# Altium PCB keyboard.pcbdoc
Units mm, origin at the board's own origin, x right, y up, seen from the top; angles counter-clockwise.
Board outline 101.85 x 125.6 mm, 2 copper layers (Top Layer, Bottom Layer); 27 components, 54 nets, 111 pads, 8 vias.
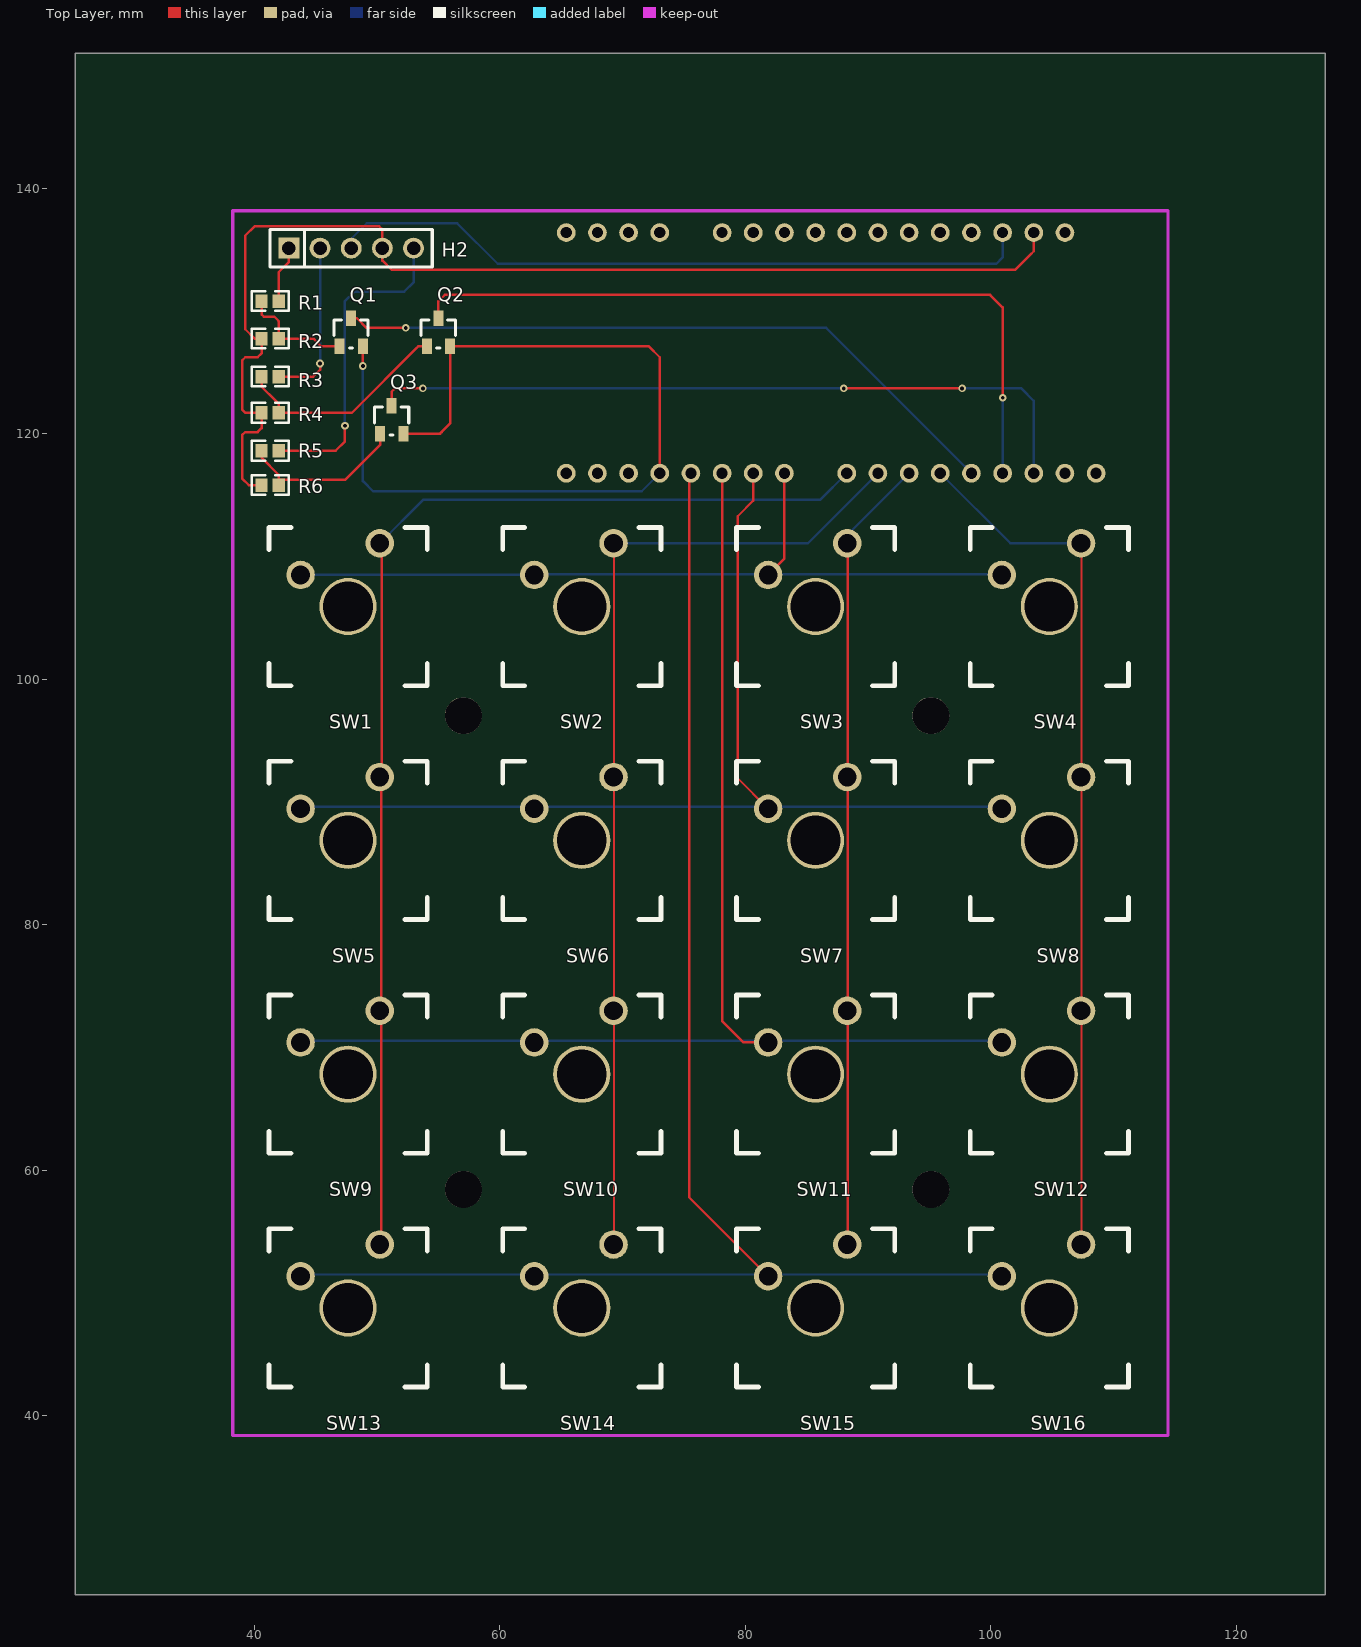
[diagram p0: Top Layer view]
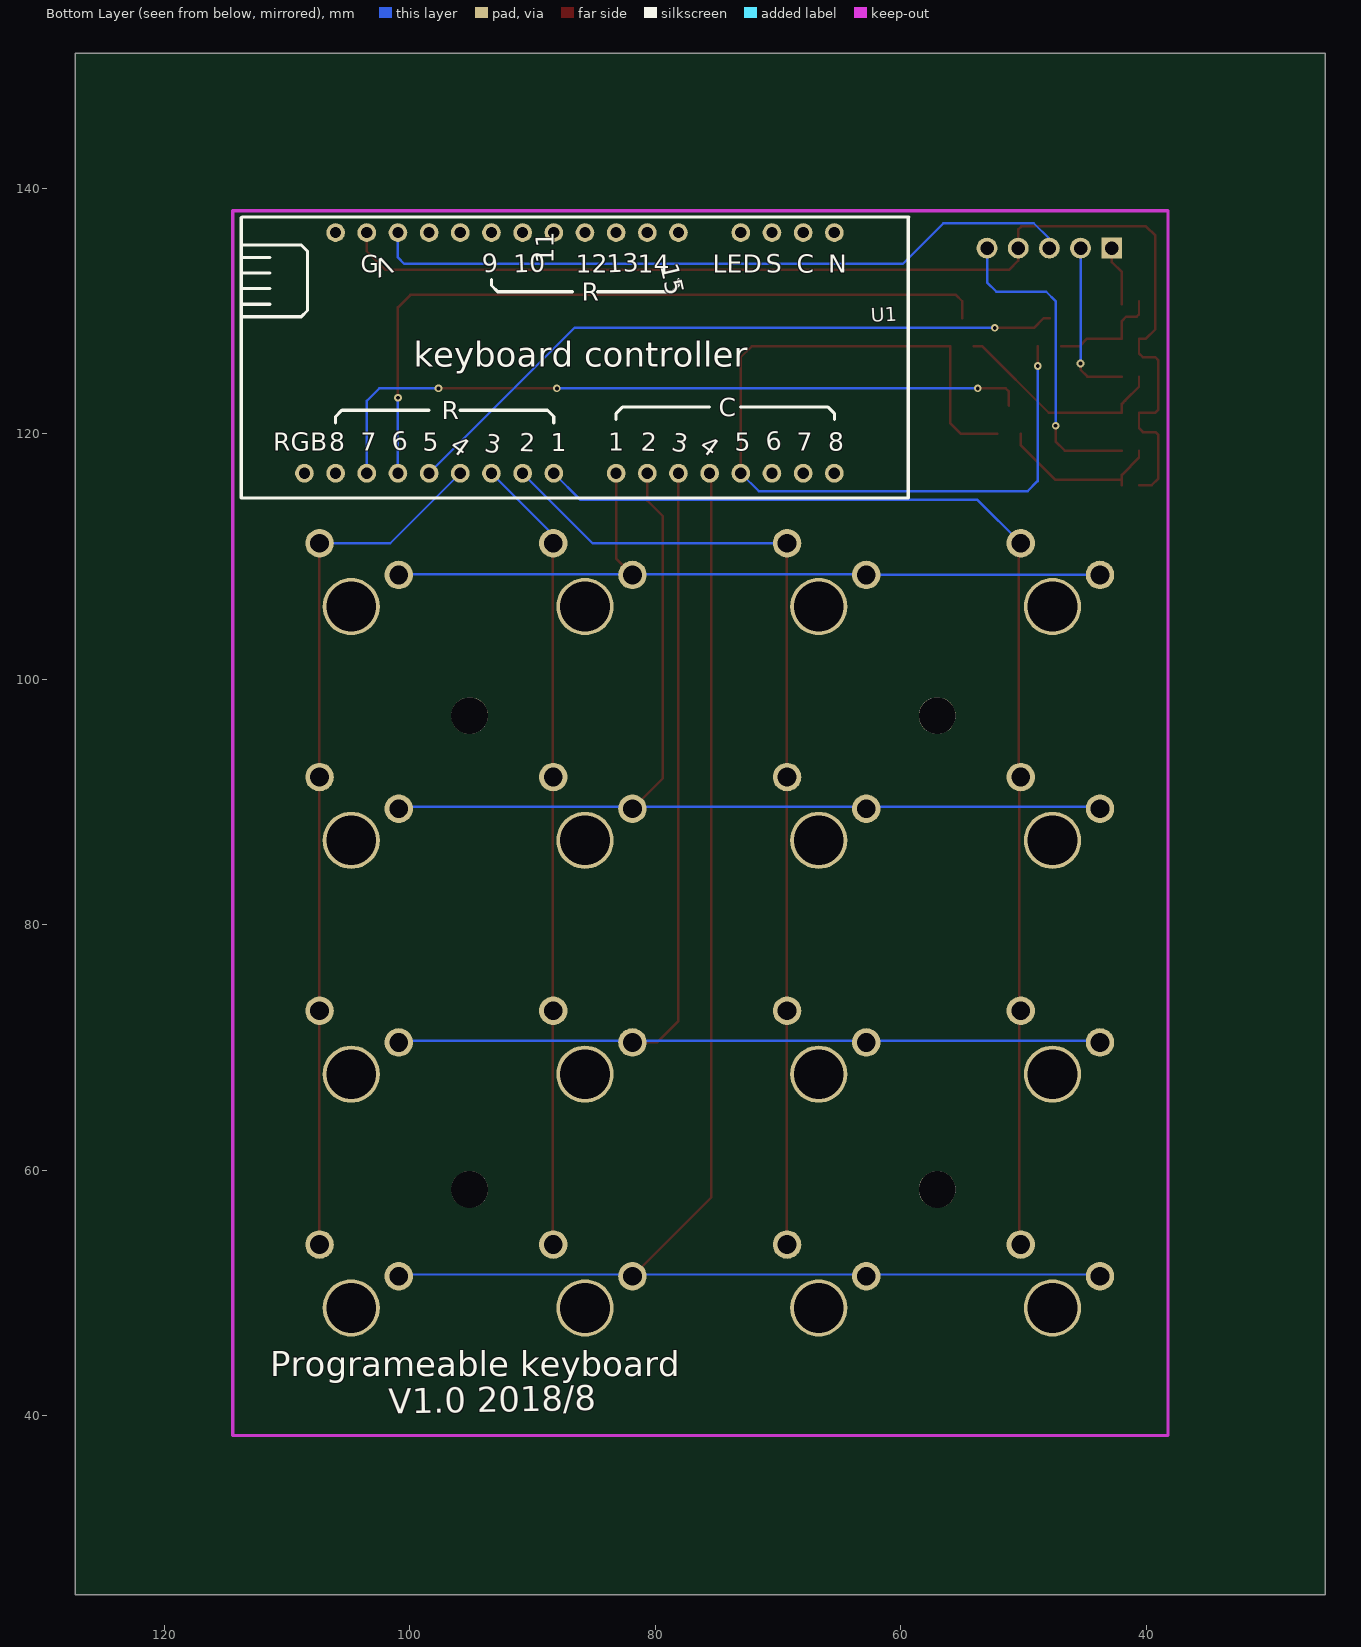
[diagram p1: Bottom Layer view, seen from below]

## Layer stack, top to bottom
Top Layer: signal copper (thickness not stored)
Dielectric: dielectric 0.32, FR-4, Dk 4.8
Bottom Layer: signal copper (thickness not stored)

## Board outline
127.254,25.4 25.4,25.4 25.4,151.003 127.254,151.003

## Components (designator, comment, footprint, x,y, rotation, side; value= is the part's Value field where it differs from the comment)
H2 "Header-Male-2.54_1x5" DIP-1X5P-2.54MM-M 47.879,135.128 r0 top
Q1 "9013M-H" SOT-23 47.879,128.27 r0 top
Q2 "9013M-H" SOT-23 54.991,128.27 r0 top
Q3 "9013M-H" SOT-23 51.181,121.158 r0 top
R1 "1KΩ" 0603 41.275,130.81 r0 top
R2 "1KΩ" 0603 41.275,127.762 r0 top
R3 "1KΩ" 0603 41.275,124.663 r0 top
R4 "1KΩ" 0603 41.275,121.716 r0 top
R5 "1KΩ" 0603 41.275,118.618 r0 top
R6 "1KΩ" 0603 41.275,115.824 r0 top
SW1 "EVQ22705R" 三脚轴无灯 47.625,105.918 r0 top
SW2 "EVQ22705R" 三脚轴无灯 66.675,105.918 r0 top
SW3 "EVQ22705R" 三脚轴无灯 85.725,105.918 r0 top
SW4 "EVQ22705R" 三脚轴无灯 104.775,105.918 r0 top
SW5 "EVQ22705R" 三脚轴无灯 47.625,86.868 r0 top
SW6 "EVQ22705R" 三脚轴无灯 66.675,86.868 r0 top
SW7 "EVQ22705R" 三脚轴无灯 85.725,86.868 r0 top
SW8 "EVQ22705R" 三脚轴无灯 104.775,86.868 r0 top
SW9 "EVQ22705R" 三脚轴无灯 47.625,67.818 r0 top
SW10 "EVQ22705R" 三脚轴无灯 66.675,67.818 r0 top
SW11 "EVQ22705R" 三脚轴无灯 85.725,67.818 r0 top
SW12 "EVQ22705R" 三脚轴无灯 104.775,67.818 r0 top
SW13 "EVQ22705R" 三脚轴无灯 47.625,48.768 r0 top
SW14 "EVQ22705R" 三脚轴无灯 66.675,48.768 r0 top
SW15 "EVQ22705R" 三脚轴无灯 85.725,48.768 r0 top
SW16 "EVQ22705R" 三脚轴无灯 104.775,48.768 r0 top
U1 "keyboard controller" "KEYBOARD CONTROLLER" 113.665,138.938 r0 bottom

## Footprints (in the part's own frame and the unit in brackets; to place one, negate y for a bottom-side part, rotate by r counter-clockwise, add the part's x,y. Pads: shape width x height; smd on the part's side, far side on the other; paste and mask are expansions set on the pad)
0603 [mm]
  rect 1x1.1 smd: 1(-0.7,0) 2(0.7,0)
  silkscreen extent -1.5,-0.8 1.5,0.8
DIP-1X5P-2.54MM-M [mm]
  rect 1.7x1.7 hole 1.1: 1(-5.08,0)
  round 1.7 hole 1.1: 2(-2.54,0) 3(0,0) 4(2.54,0) 5(5.08,0)
  silkscreen extent -6.6,-1.52 6.6,1.52
"KEYBOARD CONTROLLER" [mil]
  round 60 hole 36: 1(-200,872.05) 2(-300,872.05) 3(-400,872.05) 4(-500,872.05) 5(-600,872.05) 6(-700,872.05) 7(-800,872.05) 8(-900,872.05) 9(-1000,872.05) 10(-1200,872.05) 11(-1300,872.05) 12(-1400,872.05) 13(-1500,872.05) 14(-1600,872.05) 15(-1700,872.05) 16(-1800,872.05) 17(-1900,872.05) 18(-300,100) 19(-400,100) 20(-500,100) 21(-600,100) 22(-700,100) 23(-800,100) 24(-900,100) 25(-1000,100) 26(-1100,100) 27(-1200,100) 28(-1300,100) 29(-1400,100) 30(-1600,100) 31(-1700,100) 32(-1800,100) 33(-1900,100)
  silkscreen extent -2140,50 3,952
SOT-23 [mil]
  rect 31.89x50 smd: 1(-37.5,-45) 2(37.5,-45) 3(-0.5,45)
  silkscreen extent -56,-50 54,40
三脚轴无灯 [mil]
  round 91.4 hole 60: 1(101.6,203.2) 2(-152.4,101.6)
  round 183.5 hole 159.6: ""(0,0)
  silkscreen extent -254,-254 254,254

## Free pads (board coordinates)
  round 3 hole 3 unplated: ""(57.023,58.42) ""(57.023,97.028) ""(95.123,58.42) ""(95.123,97.028)

## Via types
v1: diameter 0.62, hole 0.305, Top Layer to Bottom Layer, 8 vias

## Nets (pads, with @x,y where several pads share a name; then routed paths per layer and width w, separated by ;. In a path a pad name is that pad's centre, name@x,y a point inside that pad or via, vN(x,y) a via of type N, cw(c..) or ccw(c..) an arc to the next point about the centre after c; other vN are vias at no path point)
$BoardOutlineNet: 
H2_1: H2.1 R1.2 | length 4.9
  Top Layer w0.2: R1.2@41.976,130.556 41.976,133.172 42.799,133.995 H2.1
H2_2: H2.2 R3.2 | length 14.3
  Top Layer w0.2: R3.2 44.78,124.663 45.339,125.222 v1(45.339,125.73) ; R3.2 42.758,124.663
  Bottom Layer w0.2: v1(45.339,125.73) H2.2
H2_5: H2.5 R5.2 | length 26.2
  Top Layer w0.2: R5.2 46.609,118.618 47.371,119.38 v1(47.371,120.65)
  Bottom Layer w0.2: v1(47.371,120.65) 47.371,130.81 48.133,131.572 52.197,131.572 52.959,132.334 H2.5
Q1_1: Q1.1 R1.1 R2.2 | length 9.3
  Top Layer w0.2: R1.1 40.575,129.731 40.767,129.54 41.621,129.54 41.933,129.228 41.975,129.186 R2.2 44.799,127.762 45.433,127.128 45.434,127.127 Q1.1
Q2_1: Q2.1 R3.1 R4.2 | length 17.8
  Top Layer w0.2: R3.1 40.574,123.83 41.702,122.702 41.976,122.43 41.976,121.925 R4.2 ; R4.2 47.93,121.716 53.213,127 53.34,127.127 Q2.1
Q3_1: Q3.1 R5.1 R6.2 | length 13.7
  Top Layer w0.2: R5.1 40.575,118.057 41.976,116.657 R6.2@41.976,116.24 ; R6.2 R6.2@41.976,116.24 ; Q3.1 50.228,119.098 47.371,116.24 R6.2@41.976,116.24
S$15: 
S$17: 
S$67: 
S$69: 
S$262: 
S$284: 
S$286: 
S$288: 
S$290: 
S$292: 
S$361: 
S$364: 
S$370: 
S$372: 
S$409: 
SW1_1: SW1.1 SW5.1 SW9.1 SW13.1 U1.9 | length 97.9
  Top Layer w0.2: SW13.1 50.32,54.043 SW9.1@50.32,72.979 ; SW9.1 SW9.1@50.32,72.979 ; SW1.1 50.373,110.911 50.373,92.196 SW5.1 50.32,91.915 SW9.1@50.32,72.979
  Bottom Layer w0.2: SW1.1 53.736,114.607 86.086,114.607 U1.9
SW1_2: SW1.2 SW2.2 SW3.2 SW4.2 U1.10 | length 66.1
  Top Layer w0.2: SW3.2 83.185,109.829 U1.10
  Bottom Layer w0.2: SW1.2 43.787,108.531 62.771,108.531 SW2.2 62.842,108.536 SW3.2@81.854,108.536 ; SW3.2 SW3.2@81.854,108.536 ; SW4.2 100.866,108.536 SW3.2@81.854,108.536
SW2_1: SW2.1 SW6.1 SW10.1 SW14.1 U1.8 | length 81.2
  Top Layer w0.2: SW14.1 69.296,53.969 SW10.1@69.296,72.979 ; SW10.1 SW10.1@69.296,72.979 ; SW6.1 SW6.1@69.296,92.029 ; SW2.1 69.296,111.038 SW6.1@69.296,92.029 ; SW10.1@69.296,72.979 SW6.1@69.296,92.029
  Bottom Layer w0.2: SW2.1 85.098,111.079 U1.8
SW3_1: SW3.1 SW7.1 SW11.1 SW15.1 U1.7 | length 65.1
  Top Layer w0.2: SW15.1 88.344,53.967 SW11.1@88.344,72.979 ; SW11.1 SW11.1@88.344,72.979 ; SW7.1 SW7.1@88.344,92.029 ; SW3.1 88.344,111.041 SW7.1@88.344,92.029 ; SW11.1@88.344,72.979 SW7.1@88.344,92.029
  Bottom Layer w0.2: SW3.1 88.306,111.747 U1.7
SW4_1: SW4.1 SW8.1 SW12.1 SW16.1 U1.6 | length 71.1
  Top Layer w0.2: SW16.1 107.394,53.967 SW12.1@107.394,72.979 ; SW12.1 SW12.1@107.394,72.979 ; SW8.1 SW8.1@107.394,92.029 ; SW4.1 107.394,111.041 SW8.1@107.394,92.029 ; SW12.1@107.394,72.979 SW8.1@107.394,92.029
  Bottom Layer w0.2: U1.6 101.595,111.079 SW4.1
SW5_2: SW5.2 SW6.2 SW7.2 SW8.2 U1.11 | length 86.4
  Top Layer w0.2: U1.11 80.645,114.554 79.375,113.284 79.375,91.927 SW7.2
  Bottom Layer w0.2: SW5.2 43.896,89.59 62.662,89.59 SW6.2 62.946,89.59 81.712,89.59 SW7.2 81.996,89.59 100.762,89.59 SW8.2
SW12_2: SW9.2 SW10.2 SW11.2 SW12.2 U1.12 | length 106.6
  Top Layer w0.2: U1.12 78.105,72.136 79.842,70.398 SW11.2
  Bottom Layer w0.2: SW9.2 43.896,70.54 62.662,70.54 SW10.2 62.946,70.54 81.712,70.54 SW11.2 81.996,70.54 100.762,70.54 SW12.2
SW13_2: SW13.2 SW14.2 SW15.2 SW16.2 U1.13 | length 125.7
  Top Layer w0.2: U1.13 75.42,116.641 75.42,57.782 SW15.2
  Bottom Layer w0.2: SW13.2 43.896,51.49 62.662,51.49 SW14.2 62.946,51.49 81.712,51.49 SW15.2 81.996,51.49 100.762,51.49 SW16.2
U1_1: U1.1
U1_2: U1.2
U1_3: Q3.3 U1.3 | length 59.9
  Top Layer w0.2: Q3.3 51.181,122.313 51.181,123.444 51.435,123.698 v1(53.721,123.698) ; v1(88.011,123.698) v1(97.663,123.698)
  Bottom Layer w0.2: v1(53.721,123.698) v1(88.011,123.698) ; v1(97.663,123.698) 102.489,123.698 103.505,122.682 U1.3
U1_4: Q2.3 U1.4 | length 61.5
  Top Layer w0.2: Q2.3 54.978,130.797 55.499,131.318 99.949,131.318 100.965,130.302 v1(100.965,122.936)
  Bottom Layer w0.2: U1.4 v1(100.965,122.936)
U1_5: Q1.3 U1.5 | length 55.8
  Top Layer w0.2: Q1.3 48.348,129.413 49.133,128.628 v1(52.333,128.627)
  Bottom Layer w0.2: v1(52.333,128.627) 86.573,128.638 U1.5
U1_14: Q1.2 Q2.2 Q3.2 U1.14 | length 74
  Top Layer w0.2: Q1.2 v1@48.834,125.427 ; Q3.2 55.118,120.015 55.245,120.142 55.944,120.84 Q2.2 ; Q2.2@55.944,126.667 Q2.2 ; U1.14 73.025,126.238 72.136,127.127 Q2.2
  Bottom Layer w0.2: v1(48.834,125.528) 48.834,116.139 49.657,115.316 71.553,115.316 U1.14
U1_15: U1.15
U1_16: U1.16
U1_17: U1.17
U1_18: U1.18
U1_19: H2.4 R2.1 R4.1 R6.1 U1.19 | length 96.1
  Top Layer w0.2: R6.1 39.537,115.824 39.533,115.828 38.989,116.372 38.989,116.84 38.989,119.888 39.243,120.142 40.259,120.142 40.575,120.458 R4.1 39.244,121.716 39.233,121.728 38.989,121.972 38.989,125.984 39.243,126.238 40.259,126.238 40.575,126.554 R2.1 40.005,127.762 39.243,128.524 39.243,136.144 40.005,136.906 50.165,136.906 50.419,136.652 H2.4 50.419,134.112 51.181,133.35 101.981,133.35 103.251,134.62 103.505,134.874 U1.19
U1_20: H2.3 U1.20 | length 58
  Bottom Layer w0.2: H2.3 47.879,135.89 49.149,137.16 56.515,137.16 59.817,133.858 100.457,133.858 100.965,134.366 U1.20
U1_21: U1.21
U1_22: U1.22
U1_23: U1.23
U1_24: U1.24
U1_25: U1.25
U1_26: U1.26
U1_27: U1.27
U1_28: U1.28
U1_29: U1.29
U1_30: U1.30
U1_31: U1.31
U1_32: U1.32
pads on no net: SW1. SW2. SW3. SW4. SW5. SW6. SW7. SW8. SW9. SW10. SW11. SW12. SW13. SW14. SW15. SW16. U1.33

## Silkscreen, mask and mechanical layers (free items; w line width, h text height)
Bottom Overlay:
  text "Programeable keyboard" at 111.379,43.18 h2.03
  text "V1.0 2018/8" at 101.709,40.132 h2.03 r359
Document:
  lines w0.003: 76.302,88.176 76.352,88.227

## Text inside footprints (layer, text, board x,y; h text height)
U1: Bottom Overlay "G" at 104.013,133.158 h1.4; Bottom Overlay "V" at 101.742,134.558 h1.5 r159; Bottom Overlay "9" at 94.029,133.112 h1.5 r354; Bottom Overlay "10" at 91.541,133.108 h1.5 r358; Bottom Overlay "11" at 88.277,133.858 h1.5 r270; Bottom Overlay "12" at 86.487,133.108 h1.5; Bottom Overlay "13" at 83.908,133.109 h1.5 r357; Bottom Overlay "14" at 81.407,133.108 h1.5; Bottom Overlay "15" at 79.598,133.689 h1.5 r77; Bottom Overlay "LED" at 75.311,133.108 h1.5; Bottom Overlay "S" at 70.967,133.108 h1.5 r358; Bottom Overlay "C" at 68.453,133.108 h1.5; Bottom Overlay "N" at 65.913,133.108 h1.5; Bottom Overlay "R" at 85.979,130.822 h1.5; Bottom Overlay "R" at 97.409,121.17 h1.5; Bottom Overlay "C" at 74.803,121.424 h1.5; Bottom Overlay "RGB" at 111.125,118.63 h1.5; Bottom Overlay "8" at 106.553,118.63 h1.5; Bottom Overlay "7" at 104.013,118.63 h1.5; Bottom Overlay "6" at 101.395,118.634 h1.5 r354; Bottom Overlay "5" at 98.933,118.63 h1.5; Bottom Overlay "4" at 96.834,118.773 h1.5 r36; Bottom Overlay "3" at 93.983,118.585 h1.5 r10; Bottom Overlay "2" at 91.085,118.574 h1.5 r2; Bottom Overlay "1" at 88.519,118.573 h1.5; Bottom Overlay "1" at 83.821,118.63 h1.5; Bottom Overlay "2" at 81.179,118.63 h1.5 r2; Bottom Overlay "3" at 78.743,118.641 h1.5 r10; Bottom Overlay "4" at 76.502,118.773 h1.5 r36; Bottom Overlay "5" at 73.533,118.63 h1.5; Bottom Overlay "6" at 70.915,118.634 h1.5 r354; Bottom Overlay "7" at 68.453,118.63 h1.5; Bottom Overlay "8" at 65.913,118.63 h1.5